# EAGLE board Dashboard rev1_TCU rev2 (EAGLE 9.5.2), part 1 of 2
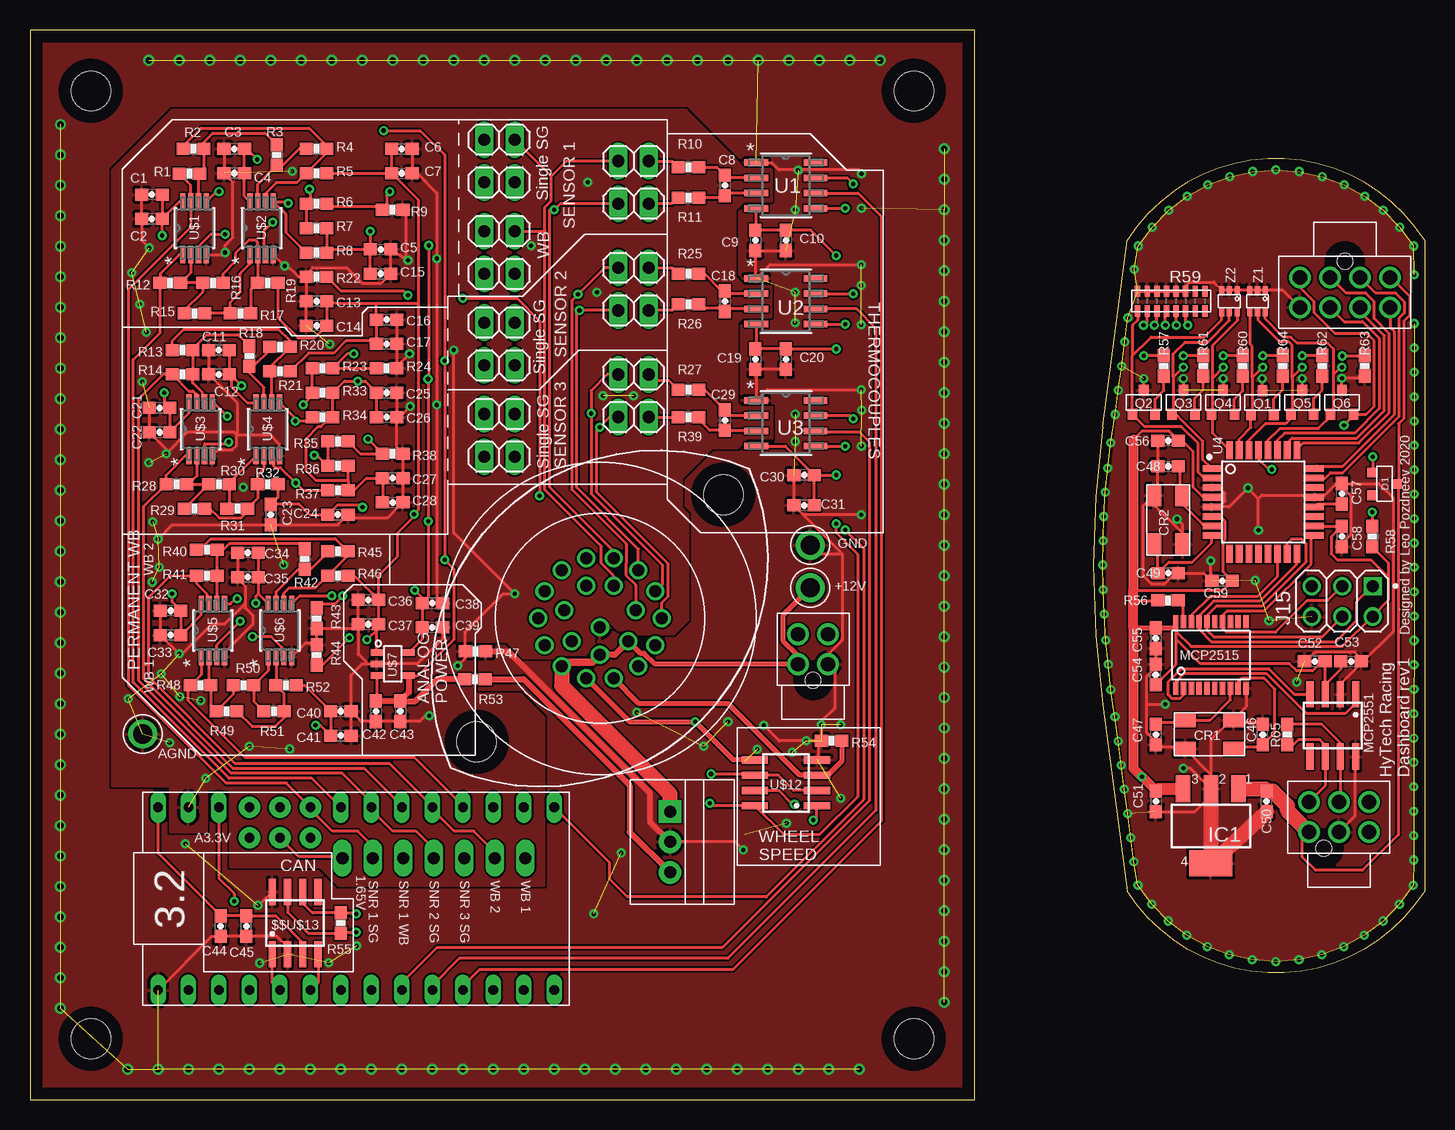
[diagram p0: board, top side]
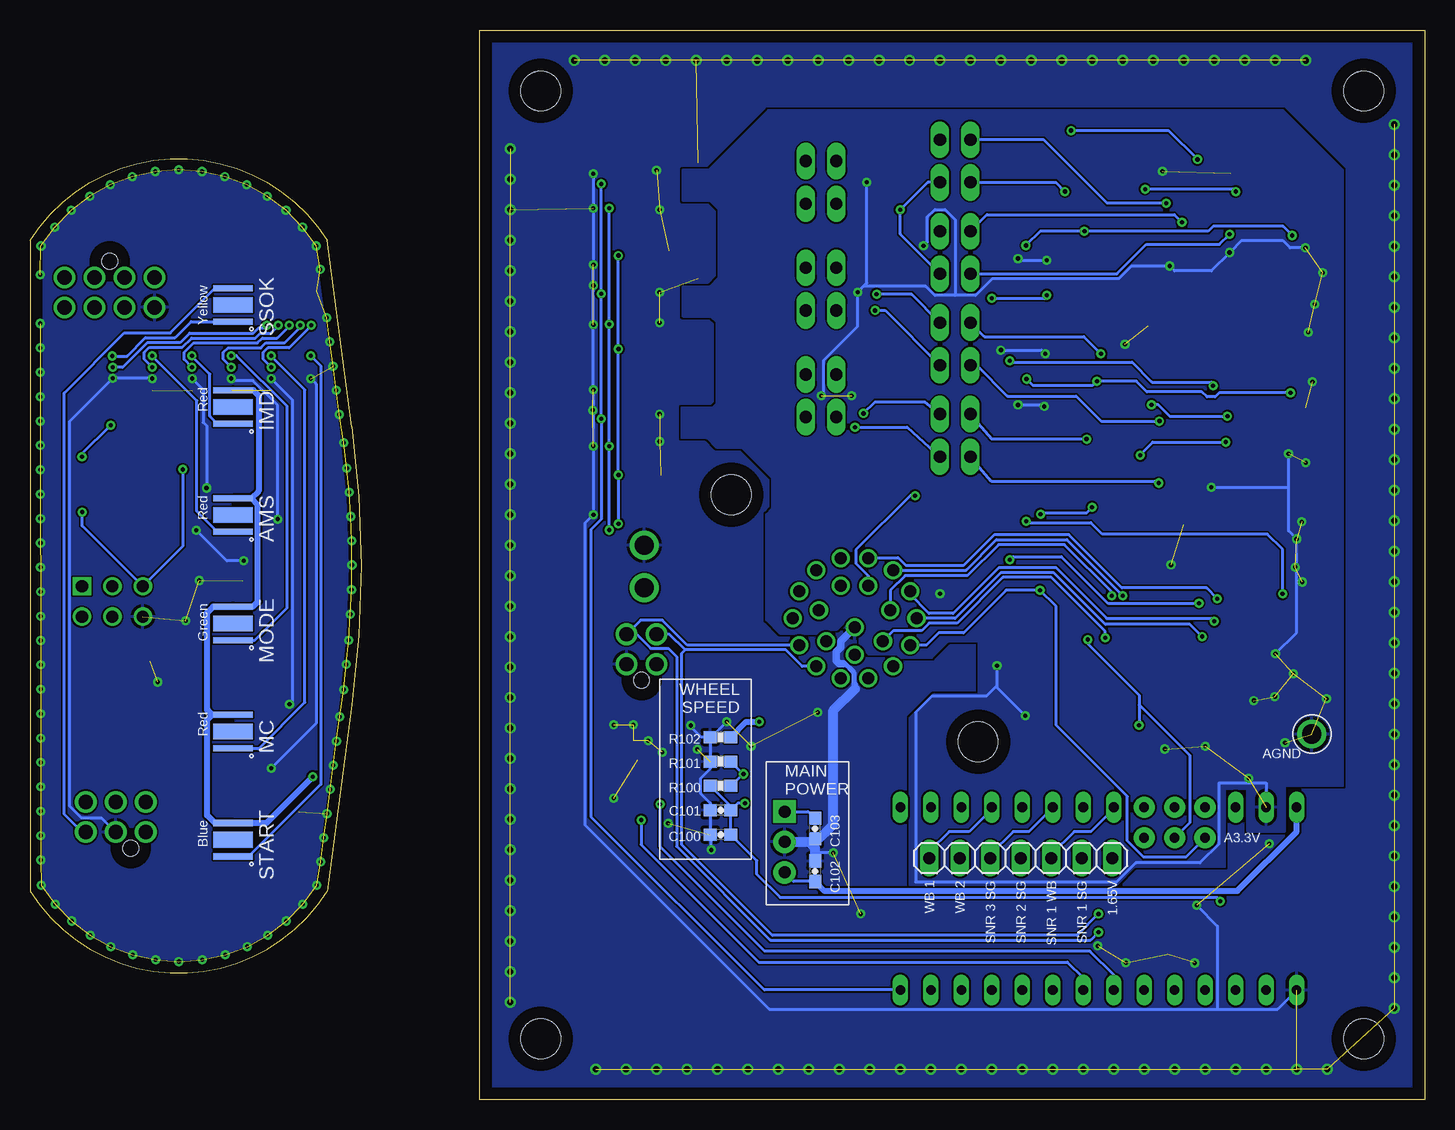
[diagram p1: board, bottom side, seen from below]

Size 116.22 x 89.15 mm. Coordinates in mm from the lower left corner, seen from the top.
Outline: 91.44,71.62 89.41,56.09 arc16 89.41,32.91 91.44,17.39 arc115 116.22,17.39 116.22,71.62 arc115 91.44,71.62
Outline: 91.44,71.62 91.44,71.62
Outline: 0,0 78.74,0 78.74,89.15 0,89.15 0,0
Copper layers (1*16): Top 0.035mm / dielectric 1.5mm / Bottom 0.035mm
Design rules "DRC Advanced Circuits": minimum track width 6mil, minimum drill 10mil, track to track 6mil, track to pad 6mil, pad to pad 6mil, via to via 6mil, smd to smd 6mil, copper to edge 40mil, drill to drill 6mil, minimum pad ring 10mil, minimum via ring 8mil, stop-mask expansion 4mil, vias tented up to drill 0mil, thermal gap 10mil
Holes 3.3 mm at 5.08,84.07 5.08,5.08 73.66,84.07 73.66,5.08

## Footprints (pad centres in the part's own frame; a part is rotated, then mirrored left to right if it is on the bottom)
TEST_POINT = drill 1.6: P$1 0,0
SOIC-08 = smd 0.6 x 2.2: 1 -1.905,-2.6; 2 -0.635,-2.6; 3 0.635,-2.6; 4 1.905,-2.6; 5 1.905,2.6; 6 0.635,2.6; 7 -0.635,2.6; 8 -1.905,2.6
NANO-FIT_VERTICAL-8 = drill 1.2: P$1 -3.75,0; P$2 -1.25,0; P$3 1.25,0; P$4 3.75,0; P$5 -3.75,2.5; P$6 -1.25,2.5; P$7 1.25,2.5; P$8 3.75,2.5 | hole 1.3: 0,-1.34
CREE_XP-E2 = smd 0.508 x 3.302: P$1 0.254,1.651; P$2 3.048,1.651 | smd 1.295 x 3.302: P$3 1.651,1.651
0603-CAP = smd 1.1 x 1: 1 -0.85,0; 2 0.85,0
ABM3B = smd 1.803 x 1.194: P$1 0.902,2.985; P$2 4.966,2.985; P$3 4.966,0.597; P$4 0.902,0.597
SOT23 = smd 0.8 x 0.9: 1 -0.95,-1; 2 0.95,-1; 3 0,1
SOT223 = smd 1.219 x 2.235: 1 -2.311,-3.099; 2 0,-3.099; 3 2.311,-3.099 | smd 3.6 x 2.2: 4 0,3.099
1X02 = drill 1.016 long: 1 -1.27,0; 2 1.27,0
2X03 = drill 1.016 square: 1 -2.54,-1.27 | drill 1.016: 2 -2.54,1.27; 3 0,-1.27; 4 0,1.27; 5 2.54,-1.27; 6 2.54,1.27
TSSOP-20 = smd 0.45 x 1.1: 1 -2.925,-2.618; 2 -2.275,-2.618; 3 -1.625,-2.618; 4 -0.975,-2.618; 5 -0.325,-2.618; 6 0.325,-2.618; 7 0.975,-2.618; 8 1.625,-2.618; 9 2.275,-2.618; 10 2.925,-2.618; 11 2.925,2.918; 12 2.275,2.918; 13 1.625,2.918; 14 0.975,2.918; 15 0.325,2.918; 16 -0.325,2.918; 17 -0.975,2.918; 18 -1.625,2.918; 19 -2.275,2.918; 20 -2.925,2.918
0603-RES = smd 1.1 x 1: 1 -0.85,0; 2 0.85,0
CAT16-*8 = smd 0.45 x 0.95: P$1 -2.8,-0.825; P$2 -2,-0.825; P$3 -1.2,-0.825; P$4 -0.4,-0.825; P$5 0.4,-0.825; P$6 1.2,-0.825; P$7 2,-0.825; P$8 2.8,-0.825; P$9 2.8,0.825; P$10 2,0.825; P$11 1.2,0.825; P$12 0.4,0.825; P$13 -0.4,0.825; P$14 -1.2,0.825; P$15 -2,0.825; P$16 -2.8,0.825
OKI-78SR = drill 1 pad 1.88 square: 1 -2.54,0 | drill 1 pad 1.88: 2 0,0; 3 2.54,0
21-0041B_8 = smd 1.981 x 0.533: 1 -2.464,1.905; 2 -2.464,0.635; 3 -2.464,-0.635; 4 -2.464,-1.905; 5 2.464,-1.905; 6 2.464,-0.635; 7 2.464,0.635; 8 2.464,1.905
QFP80P900X900X120-32N = smd 1.5 x 0.55: 1 -4.3,2.8; 2 -4.3,2; 3 -4.3,1.2; 4 -4.3,0.4; 5 -4.3,-0.4; 6 -4.3,-1.2; 7 -4.3,-2; 8 -4.3,-2.8; 17 4.3,-2.8; 18 4.3,-2; 19 4.3,-1.2; 20 4.3,-0.4; 21 4.3,0.4; 22 4.3,1.2; 23 4.3,2; 24 4.3,2.8 | smd 0.55 x 1.5: 9 -2.8,-4.3; 10 -2,-4.3; 11 -1.2,-4.3; 12 -0.4,-4.3; 13 0.4,-4.3; 14 1.2,-4.3; 15 2,-4.3; 16 2.8,-4.3; 25 2.8,4.3; 26 2,4.3; 27 1.2,4.3; 28 0.4,4.3; 29 -0.4,4.3; 30 -1.2,4.3; 31 -2,4.3; 32 -2.8,4.3
MSOP-8_MS = smd 1.397 x 0.432: 1 -2.21,0.975; 2 -2.21,0.325; 3 -2.21,-0.325; 4 -2.21,-0.975; 5 2.21,-0.975; 6 2.21,-0.325; 7 2.21,0.325; 8 2.21,0.975
SOT-23-5 = smd 1 x 0.55: 1 -1.35,0.95; 2 -1.35,0; 3 -1.35,-0.95; 4 1.35,-0.95; 5 1.35,0.95
AUTOSPORT_12-35 = drill 1: P$1 1.143,5.004; P$2 3.2,4.013; P$3 4.623,2.235; P$4 5.156,0; P$5 4.623,-2.235; P$6 3.2,-4.013; P$7 1.143,-5.004; P$8 -1.143,-5.004; P$9 -3.2,-4.013; P$10 -4.623,-2.235; P$11 -5.156,0; P$12 -3.2,4.013; P$13 -1.143,5.004; P$14 1.143,2.718; P$15 2.972,0.66; P$16 2.362,-1.905; P$17 -2.362,-1.905; P$18 -2.972,0.66; P$19 -1.143,2.718; P$20 0,-0.762; P$21 0,-3.048; P$22 -4.623,2.235 | hole 3.3: -10.288,-10.288; 10.288,10.288
TEENSY_3.2_EXT_12ANALOG_AREF = drill 0.8 long: 3.3V 16.51,29.21; A0 16.51,3.81; A1 16.51,6.35; A2 16.51,8.89; A3 16.51,11.43; A4 16.51,13.97; A5 16.51,16.51; A6 16.51,19.05; AGND 16.51,31.75; D0(RX1) 1.27,31.75; D1(TX1) 1.27,29.21; D2 1.27,26.67; D3(CANTX) 1.27,24.13; D4(CANRX) 1.27,21.59; D5 1.27,19.05; D6 1.27,16.51; D7(RX3) 1.27,13.97; D8(TX3) 1.27,11.43; D9(RX2) 1.27,8.89; D10(TX2) 1.27,6.35; D11 1.27,3.81; D12 1.27,1.27; D13 16.51,1.27; GND 1.27,34.29; VIN 16.51,34.29 | drill 0.8 pad 1.778: A7 16.51,21.59; A8 16.51,24.13; A9 16.51,26.67; A10 13.97,24.13; A11 13.97,21.59; AREF 13.97,26.67
1X07 = drill 1.016 long: 1 -7.62,0; 2 -5.08,0; 3 -2.54,0; 4 0,0; 5 2.54,0; 6 5.08,0; 7 7.62,0
NANO-FIT_VERTICAL-6 = drill 1.2: P$1 -2.5,0; P$2 0,0; P$3 2.5,0; P$4 -2.5,2.5; P$5 0,2.5; P$6 2.5,2.5 | hole 1.3: -1.25,-1.34
NANO-FIT_VERTICAL-4 = drill 1.2: P$1 -1.25,0; P$2 1.25,0; P$3 -1.25,2.5; P$4 1.25,2.5 | hole 1.3: 0,-1.34
SOT363 = smd 0.61 x 0.432: P$1 -0.965,0.673; P$2 -0.965,0.023; P$3 -0.965,-0.627; P$4 0.93,0.673; P$5 0.93,0.023; P$6 0.93,-0.627

## Placement (x,y rotation side)
$$U$11  TEST_POINT  [TEST_POINT]  9.4,30.48 0 top
$$U$13  MCP2551  [SOIC-08]  22.1,14.73 0 top
$$X2  CONNECTOR-8NANO-FIT_VERTICAL-8  [NANO-FIT_VERTICAL-8]  109.58,68.54 180 top
AMS  Red  [CREE_XP-E2]  100.94,50.38 270 bottom
C1  1uF  [0603-CAP]  10.16,75.44 180 top
C2  .1uF  [0603-CAP]  10.16,73.41 180 top
C3  1uF  [0603-CAP]  17.02,79.25 180 top
C4  .1uF  [0603-CAP]  17.02,77.22 180 top
C5  1uF  [0603-CAP]  29.21,70.87 0 top
C6  1uF  [0603-CAP]  30.99,79.25 0 top
C7  .1uF  [0603-CAP]  30.99,77.22 0 top
C8  10nF  [0603-CAP]  57.91,76.2 270 top
C9  0.1uF  [0603-CAP]  60.45,71.63 270 top
C10  1uF  [0603-CAP]  62.99,71.63 270 top
C11  1uF  [0603-CAP]  15.75,62.48 180 top
C12  .1uF  [0603-CAP]  15.75,60.45 180 top
C13  1uF  [0603-CAP]  23.88,66.55 180 top
C14  .1uF  [0603-CAP]  23.88,64.52 180 top
C15  .1uF  [0603-CAP]  29.21,68.83 0 top
C16  1uF  [0603-CAP]  29.72,65.02 0 top
C17  .1uF  [0603-CAP]  29.72,62.99 0 top
C18  10nF  [0603-CAP]  57.91,66.55 270 top
C19  0.1uF  [0603-CAP]  60.45,61.72 270 top
C20  1uF  [0603-CAP]  62.99,61.72 270 top
C21  .1uF  [0603-CAP]  10.8,57.66 180 top
C22  1uF  [0603-CAP]  10.8,55.63 180 top
C23  .1uF  [0603-CAP]  20.07,48.77 270 top
C24  1uF  [0603-CAP]  25.65,48.77 0 top
C25  .1uF  [0603-CAP]  29.72,58.93 0 top
C26  1uF  [0603-CAP]  29.72,56.9 0 top
C27  1uF  [0603-CAP]  30.23,51.82 0 top
C28  .1uF  [0603-CAP]  30.23,49.78 0 top
C29  10nF  [0603-CAP]  57.91,56.64 270 top
C30  0.1uF  [0603-CAP]  64.52,52.07 180 top
C31  1uF  [0603-CAP]  64.52,49.53 180 top
C32  1uF  [0603-CAP]  11.71,40.77 180 top
C33  .1uF  [0603-CAP]  11.71,38.73 180 top
C34  1uF  [0603-CAP]  18.16,45.59 180 top
C35  .1uF  [0603-CAP]  18.16,43.56 180 top
C36  .1uF  [0603-CAP]  28.19,41.66 180 top
C37  1uF  [0603-CAP]  28.19,39.62 180 top
C38  1uF  [0603-CAP]  33.53,41.4 0 top
C39  .1uF  [0603-CAP]  33.53,39.37 0 top
C40  1uF  [0603-CAP]  25.91,32.39 0 top
C41  .1uF  [0603-CAP]  25.91,30.35 0 top
C42  .1uF  [0603-CAP]  28.83,32.39 270 top
C43  1uF  [0603-CAP]  30.86,32.39 270 top
C44  1 uF  [0603-CAP]  15.88,14.48 90 top
C45  .1 uF  [0603-CAP]  18.03,14.48 90 top
C46  14pF  [0603-CAP]  102.72,30.44 90 top
C47  14pF  [0603-CAP]  93.83,30.44 90 top
C48  14pF  [0603-CAP]  94.85,52.79 0 top
C49  14pF  [0603-CAP]  94.85,43.9 0 top
C50  0.22uF  [0603-CAP]  103.05,24.87 90 top
C51  0.1uF  [0603-CAP]  93.83,24.87 270 top
C52  1uF  [0603-CAP]  107.07,36.53 180 top
C53  0.1uF  [0603-CAP]  110.09,36.53 0 top
C54  1uF  [0603-CAP]  93.81,35.44 90 top
C55  0.1uF  [0603-CAP]  93.81,38.47 270 top
C56  0.1uF  [0603-CAP]  94.85,54.92 180 top
C57  .1uF  [0603-CAP]  109.33,50.5 90 top
C58  0.1uF  [0603-CAP]  109.33,46.95 270 top
C59  0.1uF  [0603-CAP]  99.34,43.24 180 top
C100  1uF  [0603-CAP]  58.67,22.1 180 bottom
C101  .1uF  [0603-CAP]  58.67,24.13 180 bottom
C102  10uF  [0603-CAP]  50.8,19.05 270 bottom
C103  10uF  [0603-CAP]  50.8,22.61 90 bottom
CR1  16MHz, 10pF  [ABM3B]  95.36,28.66 0 top
CR2  16MHz, 10pF  [ABM3B]  93.07,51.27 270 top
D1  DIODE_ZENER  [SOT23]  112.88,51.33 270 top
IC1  LM340S  [SOT223]  98.4,22.82 180 top
IMD  Red  [CREE_XP-E2]  100.94,59.39 270 bottom
J1  JUMPER.1  [1X02]  39.12,80.01 180 top
J2  JUMPER.1  [1X02]  39.12,76.45 180 top
J3  JUMPER.1  [1X02]  39.12,72.39 180 top
J4  JUMPER.1  [1X02]  50.29,78.23 0 top
J5  JUMPER.1  [1X02]  50.29,74.68 0 top
J6  JUMPER.1  [1X02]  39.12,68.83 180 top
J7  JUMPER.1  [1X02]  39.12,64.77 180 top
J8  JUMPER.1  [1X02]  39.12,61.21 180 top
J9  JUMPER.1  [1X02]  50.29,69.34 0 top
J10  JUMPER.1  [1X02]  50.29,65.79 0 top
J11  JUMPER.1  [1X02]  50.29,60.45 0 top
J12  JUMPER.1  [1X02]  39.12,57.15 180 top
J13  JUMPER.1  [1X02]  39.12,53.59 180 top
J14  JUMPER.1  [1X02]  50.29,56.9 0 top
J15  AVR-ISP-HEADER  [2X03]  109.35,41.54 180 top
MC  Red  [CREE_XP-E2]  100.94,32.34 270 bottom
MCP2515  MCP2515TSSOP  [TSSOP-20]  98.4,36.92 0 top
MCP2551  MCP2551  [SOIC-08]  108.56,31.2 180 top
MODE  Green  [CREE_XP-E2]  100.94,41.36 270 bottom
Q1  [SOT23]  102.7,58.1 0 top
Q2  [SOT23]  92.82,58.12 0 top
Q3  [SOT23]  96.12,58.12 0 top
Q4  [SOT23]  99.42,58.12 0 top
Q5  [SOT23]  106.02,58.12 0 top
Q6  [SOT23]  109.33,58.12 0 top
R1  20k  [0603-RES]  13.28,77.19 0 top
R2  86.6  [0603-RES]  13.64,79.25 180 top
R3  5.1k  [0603-RES]  20.57,78.74 270 top
R4  5.1k  [0603-RES]  23.88,79.25 0 top
R5  20k  [0603-RES]  23.88,77.22 0 top
R6  120  [0603-RES]  23.88,74.68 180 top
R7  120  [0603-RES]  23.88,72.64 180 top
R8  120  [0603-RES]  23.88,70.61 0 top
R9  1.27k  [0603-RES]  30.23,74.17 180 top
R10  0  [0603-RES]  54.86,77.72 0 top
R11  0  [0603-RES]  54.86,75.18 0 top
R12  20k  [0603-RES]  11.68,68.07 180 top
R13  86.6  [0603-RES]  12.7,62.48 180 top
R14  20k  [0603-RES]  12.7,60.45 0 top
R15  5.1k  [0603-RES]  13.72,65.53 0 top
R16  177.7  [0603-RES]  15.24,68.07 0 top
R17  5.1k  [0603-RES]  17.53,65.53 180 top
R18  5.1k  [0603-RES]  18.29,61.98 270 top
R19  20k  [0603-RES]  19.81,68.07 180 top
R20  5.1k  [0603-RES]  20.83,62.74 0 top
R21  20k  [0603-RES]  20.83,60.71 0 top
R22  1.27k  [0603-RES]  23.88,68.58 0 top
R23  120  [0603-RES]  24.38,60.96 180 top
R24  1.27k  [0603-RES]  29.72,60.96 180 top
R25  0  [0603-RES]  54.86,68.83 0 top
R26  0  [0603-RES]  54.86,66.29 0 top
R27  0  [0603-RES]  54.86,59.18 0 top
R28  20k  [0603-RES]  12.19,51.31 180 top
R29  177.7  [0603-RES]  13.72,49.28 0 top
R30  5.1k  [0603-RES]  15.75,51.31 0 top
R31  5.1k  [0603-RES]  17.27,49.28 180 top
R32  20k  [0603-RES]  19.81,51.31 180 top
R33  120  [0603-RES]  24.38,58.93 180 top
R34  120  [0603-RES]  24.38,56.9 0 top
R35  120  [0603-RES]  25.65,54.86 180 top
R36  120  [0603-RES]  25.65,52.83 180 top
R37  120  [0603-RES]  25.65,50.8 0 top
R38  1.27k  [0603-RES]  30.23,53.85 180 top
R39  0  [0603-RES]  54.86,56.9 0 top
R40  177.7  [0603-RES]  14.73,45.85 180 top
R41  20k  [0603-RES]  14.73,43.69 0 top
R42  5.1k  [0603-RES]  22.89,45.06 270 top
R43  1.27k  [0603-RES]  23.88,40.13 90 top
R44  1.27k  [0603-RES]  23.88,37.08 270 top
R45  5.1k  [0603-RES]  25.65,45.72 0 top
R46  20k  [0603-RES]  25.65,43.69 0 top
R47  0  [0603-RES]  37.13,37.36 180 top
R48  20k  [0603-RES]  14.22,34.54 180 top
R49  177.7  [0603-RES]  16.38,32.39 0 top
R50  5.1k  [0603-RES]  17.78,34.54 0 top
R51  5.1k  [0603-RES]  20.32,32.39 180 top
R52  20k  [0603-RES]  21.34,34.54 180 top
R53  0  [0603-RES]  37.08,35.05 180 top
R54  150  [0603-RES]  66.8,29.92 180 top
R55  220  [0603-RES]  25.91,14.73 90 top
R56  10k  [0603-RES]  94.85,41.61 180 top
R57  [0603-RES]  94.49,61.17 270 top
R58  10k  [0603-RES]  111.87,46.95 270 top
R59  10k  [CAT16-*8]  95.1,66.56 0 top
R60  [0603-RES]  101.07,61.17 270 top
R61  [0603-RES]  97.77,61.17 270 top
R62  [0603-RES]  107.67,61.17 270 top
R63  [0603-RES]  111.23,61.17 270 top
R64  [0603-RES]  104.4,61.17 270 top
R65  120  [0603-RES]  104.78,30.43 270 top
R100  1k  [0603-RES]  58.67,26.16 180 bottom
R101  1k  [0603-RES]  58.67,28.19 180 bottom
R102  150  [0603-RES]  58.67,30.23 0 bottom
REG  5V  [OKI-78SR]  53.34,21.49 270 top
SSOK  Yellow  [CREE_XP-E2]  100.94,67.9 270 bottom
START  Blue  [CREE_XP-E2]  100.94,23.33 270 bottom
U1  MAX31855KASA+  [21-0041B_8]  62.99,76.2 0 top
U2  MAX31855KASA+  [21-0041B_8]  62.99,66.55 0 top
U3  MAX31855KASA+  [21-0041B_8]  62.99,56.39 0 top
U4  ATMEGA328P-AU  [QFP80P900X900X120-32N]  102.77,49.82 0 top
U$1  LTC6081  [MSOP-8_MS]  13.72,72.64 90 top
U$2  LTC6081  [MSOP-8_MS]  19.3,72.64 90 top
U$3  LTC6081  [MSOP-8_MS]  14.22,55.88 90 top
U$4  LTC6081  [MSOP-8_MS]  19.81,55.88 90 top
U$5  LTC6081  [MSOP-8_MS]  15.24,39.12 90 top
U$6  LTC6081  [MSOP-8_MS]  20.83,39.12 90 top
U$7  REF2033  [SOT-23-5]  30.23,36.32 0 top
U$8  CONNECTOR-22  [AUTOSPORT_12-35]  47.5,40.13 0 top
U$9  TEST_POINT  [TEST_POINT]  65.02,46.23 0 top
U$10  TEST_POINT  [TEST_POINT]  65.02,42.67 0 top
U$12  MCP6002SOIC  [SOIC-08]  62.99,26.42 90 top
U$14  TEENSY_3.2_EXT_12ANALOG_AREF  [TEENSY_3.2_EXT_12ANALOG_AREF]  44.96,7.87 90 top
U$100  M07  [1X07]  33.66,20.14 180 bottom
X1  CONNECTOR-6NANO-FIT_VERTICAL-6  [NANO-FIT_VERTICAL-6]  109.07,22.31 0 top
X7  CONNECTOR-4NANO-FIT-VERTICAL-4  [NANO-FIT_VERTICAL-4]  65.25,36.3 0 top
Z1  MMBZ5245BTS-7-F  [SOT363]  102.26,66.53 270 top
Z2  MMBZ5245BTS-7-F  [SOT363]  99.93,66.53 270 top

## Library data of the parts
$$U$11 $$U$13 $$X2 AMS C1-C59 C100-C103 CR1 CR2 D1 IMD J1-J14 MC MCP2515 MCP2551 MODE Q1-Q6 R1-R65 R100-R102 REG SSOK START U$1-U$7 U$9 U$10 U$12 U$14 U$100 X1 X7 Z1 Z2 = HyTechDevices
IC1 = linear
J15 = HyTechDevices; DIGIKEY: S2011EC-03-ND
U1-U3 = HyTechDevices; MANUFACTURER_PART_NUMBER: MAX31855KASA+; VENDOR: Maxim Integrated Products
U4 = HyTechDevices; AVAILABILITY: Unavailable; DESCRIPTION: AVR AVR® ATmega Microcontroller IC 8-Bit 20MHz 32KB _16K x 16_ FLASH 32-TQFP _7x7_; MF: Microchip; MP: ATMEGA328P-AU; PACKAGE: TQFP-32 Microchip; PRICE: None
U$8 = HyTechDevices; PINS: 22

## Nets
+1V65A: C6.1 C7.1 C13.1 C14.1 C16.1 C17.1 C23.1 C24.1 C36.1 C37.1 C40.1 C41.1 R5.2 R19.1 R21.2 R32.1 R46.2 R52.1 U$7.1 U$14.A10 U$100.1
+3V3: C9.1 C10.1 C19.1 C20.1 C30.1 C31.1 C100.1 C101.1 R100.2 U1.4 U2.4 U3.4 U$12.8 U$14.3.3V
+3V3A: C1.1 C2.1 C5.1 C15.1 C21.1 C22.1 C25.1 C26.1 C27.1 C28.1 C32.1 C33.1 C38.1 C39.1 R7.1 R8.2 R33.1 R34.2 R36.1 R37.2 U$1.8 U$3.8 U$5.8 U$7.5 U$8.P$10 U$14.AREF
+5V: $$U$13.3 C44.2 C45.2 C102.2 R53.1 REG.3 U$14.VIN
+5V1: AMS.P$1 C51.1 C52.1 C53.1 C54.1 C55.1 C56.1 C58.1 C59.1 IC1.3 IMD.P$1 J15.2 MC.P$1 MCP2515.20 MCP2551.3 MODE.P$1 R56.2 R58.2 START.P$1 U4.4 U4.6 U4.18
+5VA: C3.1 C4.1 C11.1 C12.1 C34.1 C35.1 C42.1 C43.1 R53.2 U$2.8 U$4.8 U$6.8 U$7.3 U$7.4
+12V: C103.2 REG.1 U$8.P$9 U$8.P$16 U$8.P$21 U$10.P$1 X7.P$1
+12V1: $$X2.P$1 C50.2 D1.3 IC1.1 X1.P$1
AGND: $$U$11.P$1 C1.2 C2.2 C3.2 C4.2 C5.2 C6.2 C7.2 C11.2 C12.2 C13.2 C14.2 C15.2 C16.2 C17.2 C21.2 C22.2 C23.2 C24.2 C25.2 C26.2 C27.2 C28.2 C32.2 C33.2 C34.2 C35.2 C36.2 C37.2 C38.2 C39.2 C40.2 C41.2 C42.2 C43.2 R9.1 R22.1 R24.1 R38.1 R43.1 R44.1 R47.2 U$1.4 U$2.4 U$3.4 U$4.4 U$5.4 U$6.4 U$7.2 U$14.AGND
BTN_EXTRA: $$X2.P$7 U4.27
BTN_MARK_READ: $$X2.P$2 U4.23
BTN_MC_CYCLE_READ: $$X2.P$3 U4.25
BTN_MODE_READ: $$X2.P$5 U4.24
BTN_START_READ: $$X2.P$6 U4.26
BUZZER_CTRL: Q6.1 R59.P$6 U4.28 Z1.P$4
BUZZER_OUT: $$X2.P$4 D1.1 Q6.2
CANH: $$U$13.7 R55.1 U$8.P$5 X7.P$4
CANH1: MCP2551.7 R65.1 X1.P$5
CANL: $$U$13.6 R55.2 U$8.P$6 X7.P$3
CANL1: MCP2551.6 R65.2 X1.P$4
CANRX: $$U$13.4 U$14.D4(CANRX)
CANTX: $$U$13.1 U$14.D3(CANTX)
CS: MCP2515.18 U4.14
CS1: U1.6 U$14.D9(RX2)
CS2: U2.6 U$14.D8(TX3)
CS3: U3.6 U$14.D7(RX3)
GND: $$U$13.2 $$U$13.8 C9.2 C10.2 C19.2 C20.2 C30.2 C31.2 C44.1 C45.1 C100.2 C101.2 C102.1 C103.1 R47.1 R54.2 R101.2 R102.1 REG.2 U1.1 U2.1 U3.1 U$8.P$20 U$9.P$1 U$12.4 U$14.GND X7.P$2
GND1: $$X2.P$8 C46.2 C47.1 C48.1 C49.2 C50.1 C51.2 C52.2 C53.2 C54.2 C55.2 C56.2 C57.2 C58.2 C59.2 CR1.P$2 CR1.P$4 CR2.P$2 CR2.P$4 IC1.2 IC1.4 J15.6 MCP2515.10 MCP2551.2 MCP2551.8 Q1.3 Q2.3 Q3.3 Q4.3 Q5.3 Q6.3 R59.P$11 R59.P$12 R59.P$13 R59.P$14 R59.P$15 R59.P$16 R63.2 U4.3 U4.5 U4.21 X1.P$2 Z1.P$1 Z1.P$2 Z1.P$3 Z2.P$1 Z2.P$2 Z2.P$3
LED_AMS_CTRL: Q5.1 R59.P$5 U4.30 Z1.P$5
LED_IMD_CTRL: Q1.1 R59.P$4 U4.31 Z1.P$6
LED_MC_ERR_CTRL: Q3.1 R59.P$2 U4.1 Z2.P$5
LED_MODE_CTRL: Q4.1 R59.P$3 U4.32 Z2.P$4
LED_START_CTRL: Q2.1 R59.P$1 U4.2 Z2.P$6
MISO: U1.7 U2.7 U3.7 U$14.D12
MISO1: J15.1 MCP2515.17 U4.16
MOSI: J15.4 MCP2515.16 U4.15
N$1: R50.2 R51.2 U$6.1
N$2: C8.1 R10.2 U1.2
N$3: R49.2 R51.1 R52.2 U$6.2
N$4: R40.2 R45.2 R46.1 U$6.6
N$5: R48.1 R49.1 R50.1 U$5.2
N$6: C8.2 R11.2 U1.3
N$7: MCP2515.19 R56.1
N$8: R42.2 R45.1 U$6.7
N$9: R40.1 R41.2 R42.1 U$5.6
N$10: R16.2 R17.1 R19.2 U$2.2
N$11: R2.2 R4.2 R5.1 U$2.6
N$12: R15.2 R17.2 U$2.1
N$13: R12.1 R15.1 R16.1 U$1.2
N$14: R3.2 R4.1 U$2.7
N$15: C18.1 R25.2 U2.2
N$16: C18.2 R26.2 U2.3
N$17: R29.2 R31.1 R32.2 U$4.2
N$18: R13.2 R20.2 R21.1 U$4.6
N$19: R30.2 R31.2 U$4.1
N$20: C46.1 CR1.P$3 MCP2515.9
N$21: R28.1 R29.1 R30.1 U$3.2
N$22: R18.2 R20.1 U$4.7
N$23: R13.1 R14.2 R18.1 U$3.6
N$24: C47.2 CR1.P$1 MCP2515.8
N$25: C29.1 R27.2 U3.2
N$26: C29.2 R39.2 U3.3
N$27: C48.2 CR2.P$1 U4.7
N$28: C49.1 CR2.P$3 U4.8
N$29: Q2.2 R57.2
N$30: Q4.2 R60.2
N$31: MODE.P$2 R60.1
N$32: Q1.2 R64.2
N$33: IMD.P$2 R64.1
N$34: R63.1 SSOK.P$2
N$35: AMS.P$2 R62.1
N$36: Q5.2 R62.2
N$37: Q3.2 R61.2
N$38: MC.P$2 R61.1
N$39: C57.1 U4.20
N$40: R57.1 START.P$2
N$77: R1.2 R2.1 R3.1 U$1.6
RESET: J15.5 R58.1 U4.29
RX: MCP2515.2 MCP2551.4
SCK: U1.5 U2.5 U3.5 U$14.D13
SCK1: J15.3 MCP2515.14 U4.17
SG1_GND*: R44.2 U$8.P$17
SG1_V+: U$6.3 U$8.P$11
SG1_V-: U$5.3 U$8.P$22
SG1_VOUT: R48.2 U$5.1 U$14.A2 U$100.7
SG2_GND*: R43.2 U$8.P$18
SG2_V+: U$6.5 U$8.P$12
SG2_V-: U$5.5 U$8.P$13
SG2_VOUT: R41.1 U$5.7 U$14.A3 U$100.6
SNR3_SG_GND*: J12.2 R35.1 R38.2
SRN1-1: J2.1 J5.1 J6.1 U$8.P$1
SRN1-2: J1.1 J3.1 J4.1 U$8.P$14
SRN1_SG_GND*: J2.2 R6.1 R9.2
SRN1_SG_V+: J1.2 R8.1 U$2.5
SRN1_SG_V-: R6.2 R7.2 U$1.5
SRN1_SG_VOUT: R1.1 U$1.7 U$14.A7 U$100.2
SRN1_T+: J5.2 R11.1
SRN1_T-: J4.2 R10.1
SRN1_WB_GND*: R22.2 U$8.P$19
SRN1_WB_V+: J3.2 U$2.3
SRN1_WB_V-: J6.2 U$1.3
SRN1_WB_VOUT: R12.2 U$1.1 U$14.A6 U$100.3
SRN2-1: J8.1 J10.1 U$8.P$2
SRN2-2: J7.1 J9.1 U$8.P$15
SRN2_SG_GND*: J7.2 R23.1 R24.2
SRN2_SG_V+: J8.2 R34.1 U$4.5
SRN2_SG_V-: R23.2 R33.2 U$3.5
SRN2_SG_VOUT: R14.1 U$3.7 U$14.A5 U$100.4
SRN2_T+: J10.2 R26.1
SRN2_T-: J9.2 R25.1
SRN3-1: J13.1 J14.1 U$8.P$4
SRN3-2: J11.1 J12.1 U$8.P$3
SRN3_SG_V+: J13.2 R37.1 U$4.3
SRN3_SG_V-: R35.2 R36.2 U$3.3
SRN3_SG_VOUT: R28.2 U$3.1 U$14.A4 U$100.5
SRN3_T+: J14.2 R39.1
SRN3_T-: J11.2 R27.1
SSOK: SSOK.P$1 X1.P$3
TX: MCP2515.1 MCP2551.1
V_DIV: R100.1 R101.1 U$12.2 U$12.6
WS1: U$12.1 U$14.D6
WS1_OUT: R54.1 U$8.P$7 U$12.3
WS2: U$12.7 U$14.D5
WS2_OUT: R102.2 U$8.P$8 U$12.5